# Altium PCB ATM90E3x-DB.PcbDoc
Units mil, origin at the board's own origin, x right, y up, seen from the top; angles counter-clockwise.
Board outline 4724.41 x 3543.31 mil, 2 copper layers (Top Layer, Bottom Layer); 146 components, 104 nets, 365 pads, 116 vias.
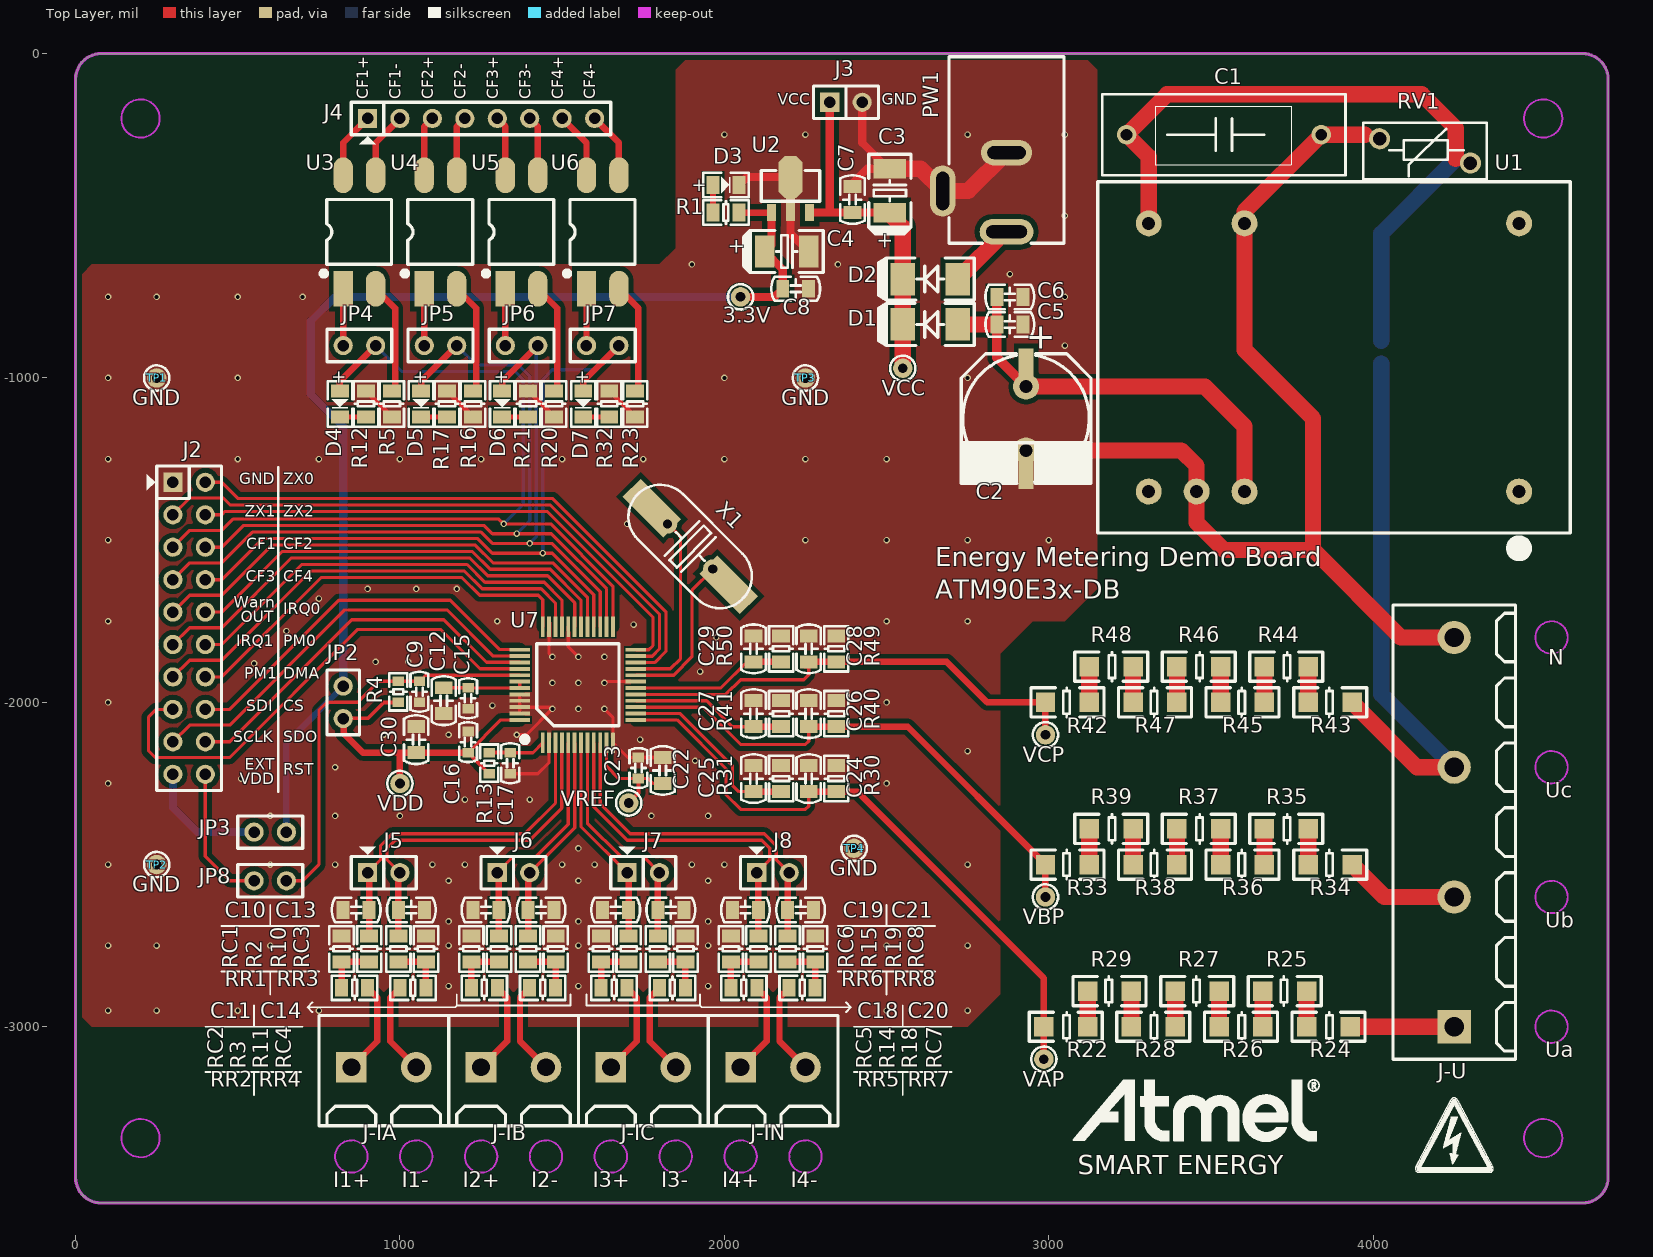
[diagram p0: Top Layer view]
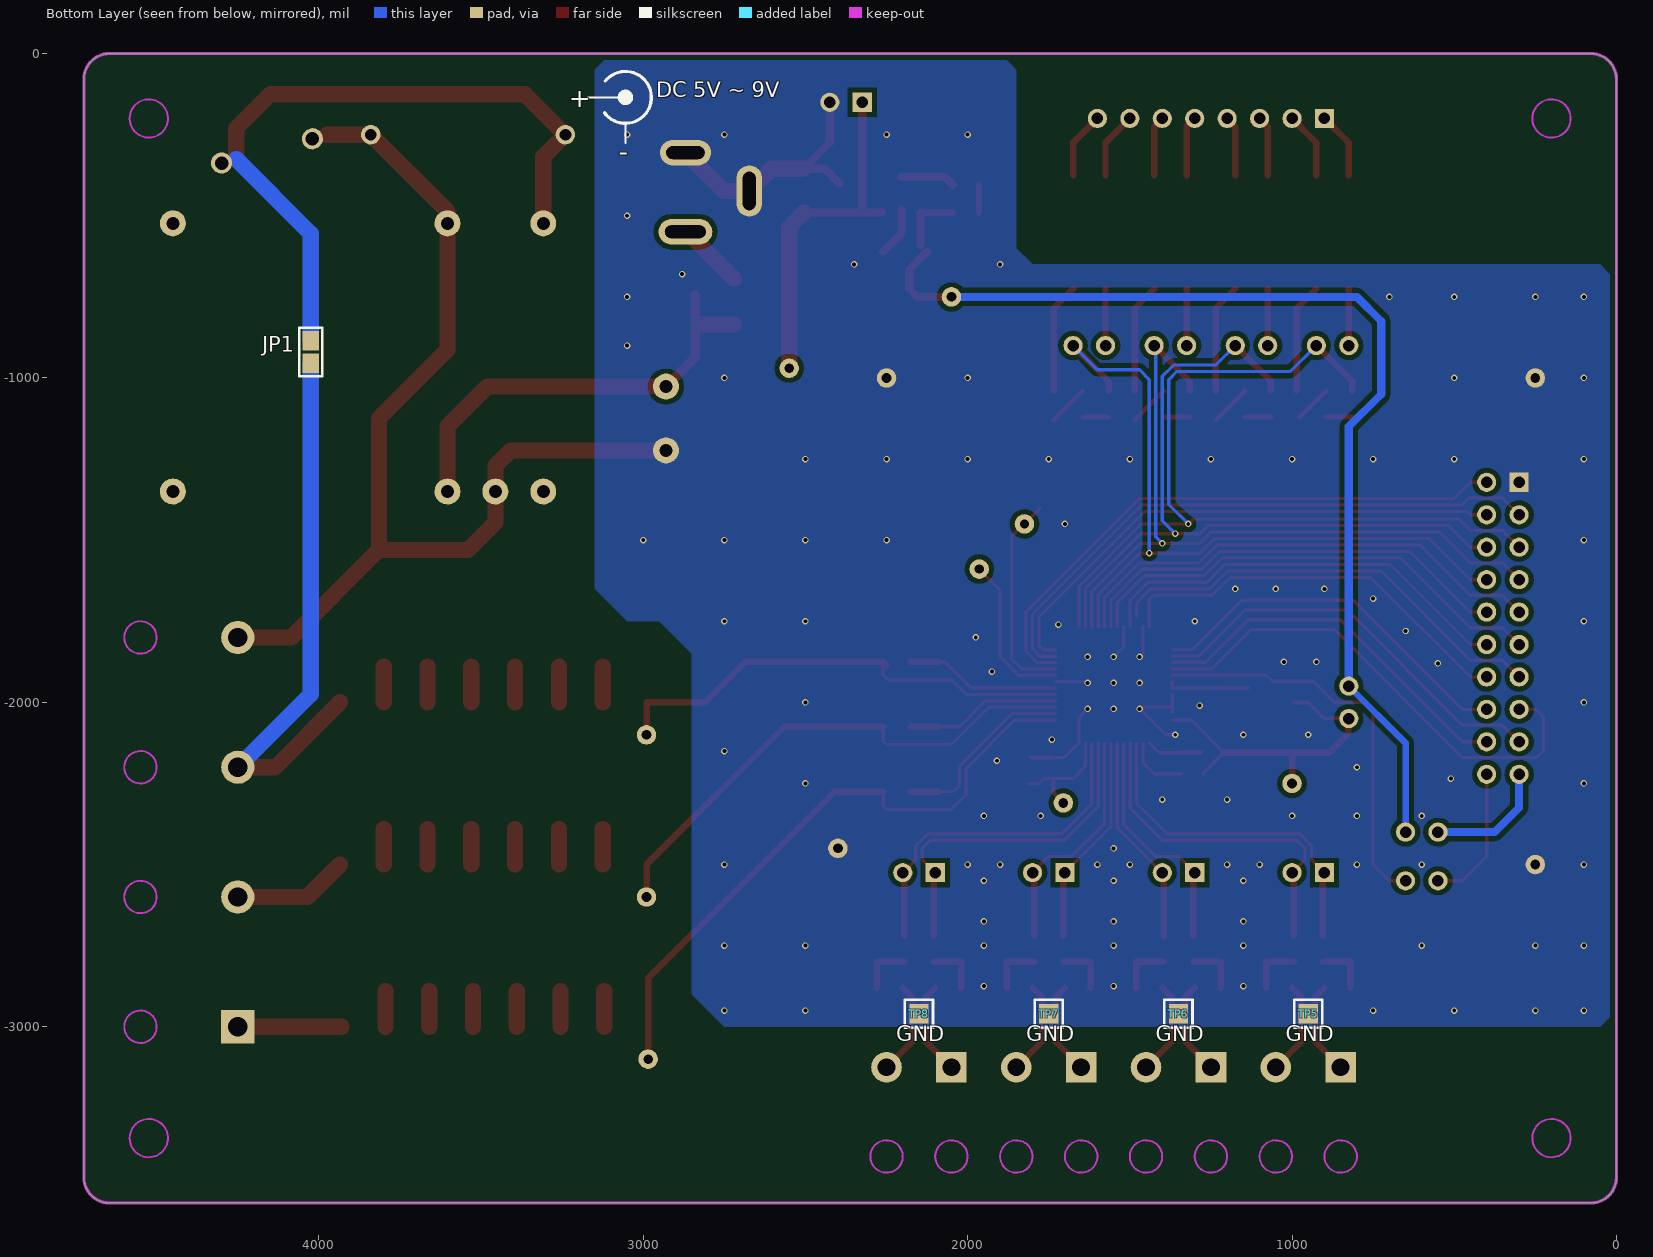
[diagram p1: Bottom Layer view, seen from below]
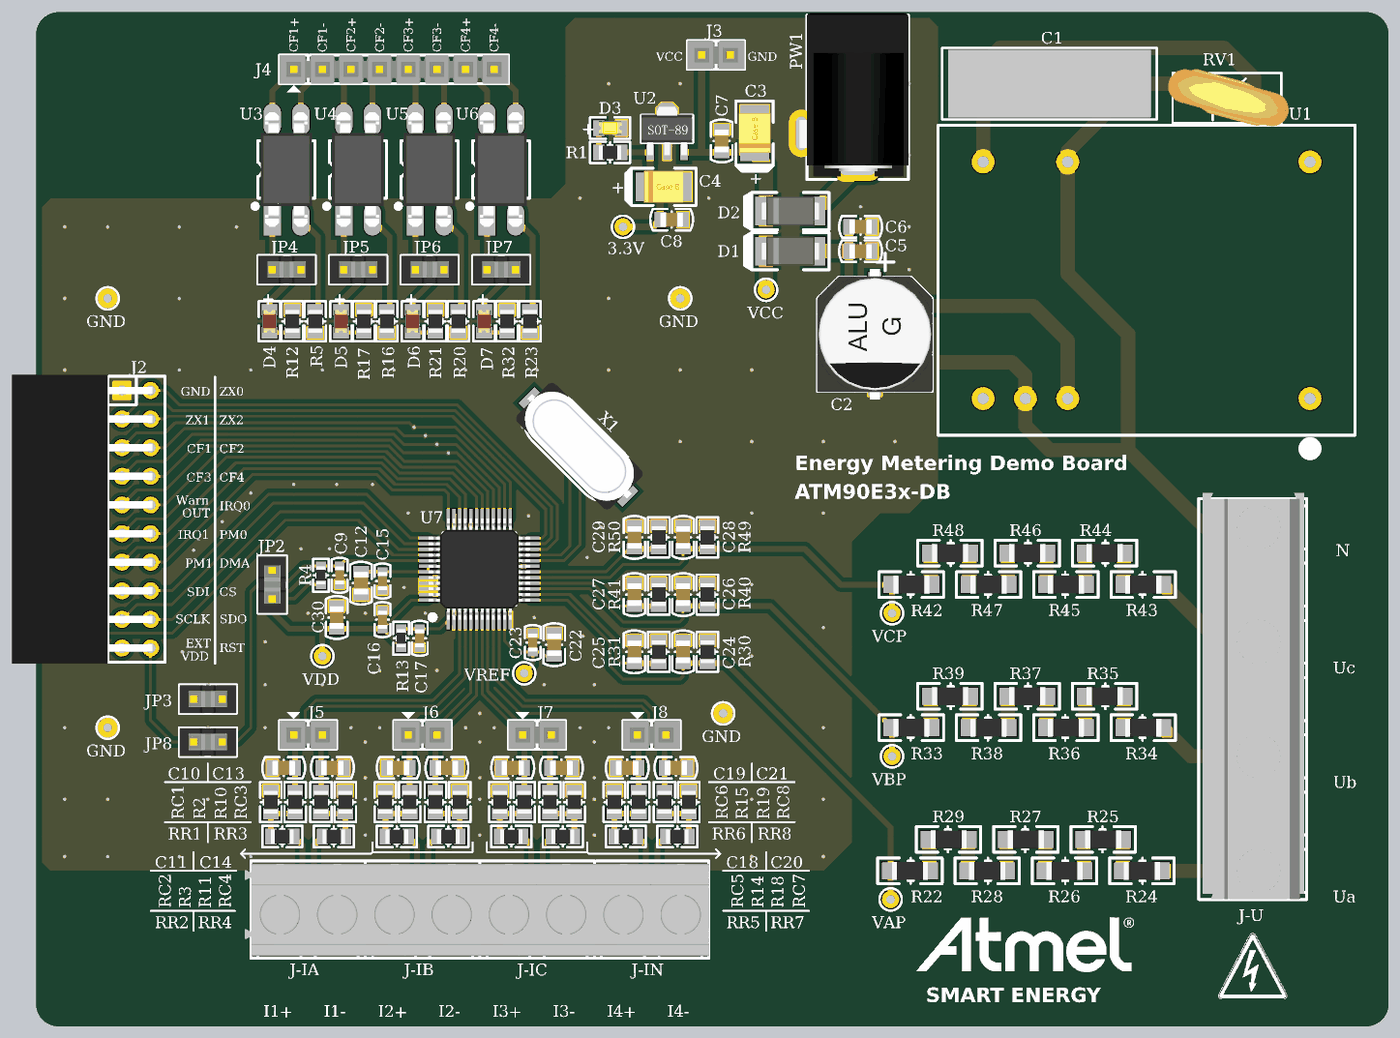
[diagram p2: 3D render of the assembled board from above, using the file's embedded part models]

## Layer stack, top to bottom
Top Layer: signal copper 1.4
Dielectric: dielectric 12.6, FR-4, Dk 4.8
Bottom Layer: signal copper 1.4

## Board outline
0,-3464.57 ccw(c78.74,-3464.57) 78.74,-3543.31 4645.67,-3543.31 ccw(c4645.67,-3464.57) 4724.41,-3464.57 4724.41,-78.74 ccw(c4645.67,-78.74) 4645.67,0 78.74,0 ccw(c78.74,-78.74) 0,-78.74

## Design rules (kind name [scope] priority, off if disabled: settings)
Clearance TQFP-48 [InComponent('U7')] p1: gap=6
Clearance Polygon [IsRegion] p2: gap=15
Clearance [All] p3: gap=8
MinimumSolderMaskSliver [All] p1 off: minsoldermaskwidth=10
NetAntennae [All] p1 off: netantennaetolerance=0
PolygonConnect [All] p1: connectstyle=Direct reliefconductorwidth=20 reliefentries=4 polygonreliefangle="90 Angle" airgapwidth=15
RoutingVias [All] p1: holewidth=28 width=50 viastyle="Through Hole" minholewidth=28 minwidth=50 maxholewidth=28 maxwidth=50
SilkToSilkClearance [All] p1 off: silktosilkclearance=10
SilkscreenOverComponentPads [All] p1 off: minsilkscreentomaskgap=10
SolderMaskExpansion [All] p1: expansion=4
Width [All] p1: maxlimit=100 minlimit=8 preferedwidth=10
24 further rules are at their usual default settings.

## Components (designator, comment, footprint, x,y, rotation, side; value= is the part's Value field where it differs from the comment)
3.3V "" TP 2050,-750 r0 top
C1 "100pF" C_FILM_600 3840,-250 r180 top
C2 "220uF" C_ALUM_MIX_10X10 2930,-1125 r180 top
C3 "22uF" C_TANT_B3528 2510,-490 r90 top
C4 "22uF" C_TANT_B3528 2125,-610 r0 top
C5 "10uF" C0805 2920,-835 r180 top
C6 "0.1uF" C0805 2920,-750 r180 top
C7 "0.1uF" C0805 2395,-410 r270 top
C8 "0.1uF" C0805 2260,-725 r180 top
C9 "0.1uF" C0603 1060,-2000 r90 top
C10 "18nF" C0805 825,-2640 r0 top
C11 "18nF" C0805 1305,-2640 r180 top
C12 "10uF" C0805 1135,-1955 r270 top
C13 "18nF" C0805 995,-2640 r0 top
C14 "18nF" C0805 1475,-2640 r180 top
C15 "0.1uF" C0603 1210,-2020 r90 top
C16 "0.1uF" C0603 1210,-2155 r90 top
C17 "0.1uF" C0603 1340,-2220 r90 top
C18 "18nF" C0805 1705,-2640 r180 top
C19 "18nF" C0805 2105,-2640 r180 top
C20 "18nF" C0805 1875,-2640 r180 top
C21 "18nF" C0805 2275,-2640 r180 top
C22 "10uF" C0805 1810,-2170 r270 top
C23 "0.1uF" C0603 1735,-2170 r270 top
C24 "18nF" C0805 2260,-2195 r270 top
C25 "18nF" C0805 2090,-2195 r270 top
C26 "18nF" C0805 2260,-1995 r270 top
C27 "18nF" C0805 2090,-1995 r270 top
C28 "18nF" C0805 2260,-1795 r270 top
C29 "18nF" C0805 2090,-1795 r270 top
C30 "10uF" C0805 1050,-2075 r270 top
D1 "1N4147" "SMA DO-214AC" 2720,-835 r180 top
D2 "1N4147" "SMA DO-214AC" 2720,-695 r180 top
D3 "Yellow" LED-0805Y 1965,-405 r0 top
D4 "Red" LED-0805R 815,-1040 r270 top
D5 "Red" LED-0805R 1065,-1040 r270 top
D6 "Red" LED-0805R 1315,-1040 r270 top
D7 "Red" LED-0805R 1565,-1040 r270 top
J2 "HDR2X10" HDR2X10 300,-1321.65 r270 top locked
J3 "HDR1X2" HDR1X2 2325,-150 r0 top
J4 "HDR1X8" HDR1X8 900,-200 r0 top
J5 "CON-2" HDR1X2(UPER) 900,-2525 r0 top
J6 "CON-2" HDR1X2(UPER) 1300,-2525 r0 top
J7 "CON-2" HDR1X2(UPER) 1700,-2525 r0 top
J8 "CON-2" HDR1X2(UPER) 2100,-2525 r0 top
J-IA "" TE-1776119-2 850,-3125 r0 top
J-IB "" TE-1776119-2 1250,-3125 r0 top
J-IC "" TE-1776119-2 1650,-3125 r0 top
J-IN "" TE-1776119-2 2050,-3125 r0 top
J-U "" TE-282843-4 4250,-3000 r90 top
JP1 "JMP" JMP-SMD 4025,-955 r90 bottom
JP2 "JMP" JMP 825,-1950 r270 top (schematic designator JP3)
JP3 "JMP" JMP 650,-2400 r180 top
JP4 "JMP" JMP 925,-900 r180 top
JP5 "JMP" JMP 1175,-900 r180 top
JP6 "JMP" JMP 1425,-900 r180 top
JP7 "JMP" JMP 1675,-900 r180 top
JP8 "JMP" JMP 650,-2550 r180 top (schematic designator JP3)
PW1 "PowerJack" POWERJACKET2.5 2870,-549.37 r180 top
R1 "510R" R0805 1965,-490 r0 top
R2 "1K" R0805 905,-2720 r270 top
R3 "1K" R0805 1305,-2800 r90 top
R4 "10K" R0603 995,-1935 r270 top
R5 "510R" R0805 975,-1120 r90 top
R10 "1K" R0805 995,-2720 r270 top
R11 "1K" R0805 1395,-2800 r90 top
R12 "510R" R0805 895,-1040 r270 top
R13 "0R" R0603 1275,-2220 r90 top
R14 "1K" R0805 1705,-2800 r90 top
R15 "1K" R0805 2105,-2800 r90 top
R16 "510R" R0805 1225,-1120 r90 top
R17 "510R" R0805 1145,-1040 r270 top
R18 "1K" R0805 1795,-2800 r90 top
R19 "1K" R0805 2195,-2800 r90 top
R20 "510R" R0805 1475,-1120 r90 top
R21 "510R" R0805 1395,-1040 r270 top
R22 "240K" R1206 3120,-3000 r180 top
R23 "510R" R0805 1725,-1120 r90 top
R24 "240K" R1206 3930,-3000 r180 top
R25 "240K" R1206 3660,-2890 r0 top
R26 "240K" R1206 3660,-3000 r180 top
R27 "240K" R1206 3390,-2890 r0 top
R28 "240K" R1206 3390,-3000 r180 top
R29 "240K" R1206 3120,-2890 r0 top
R30 "1K" R0805 2345,-2195 r270 top
R31 "1K" R0805 2175,-2195 r270 top
R32 "510R" R0805 1645,-1040 r270 top
R33 "240K" R1206 2990,-2500 r0 top
R34 "240K" R1206 3800,-2500 r0 top
R35 "240K" R1206 3800,-2390 r180 top
R36 "240K" R1206 3530,-2500 r0 top
R37 "240K" R1206 3530,-2390 r180 top
R38 "240K" R1206 3260,-2500 r0 top
R39 "240K" R1206 3260,-2390 r180 top
R40 "1K" R0805 2345,-1995 r270 top
R41 "1K" R0805 2175,-1995 r270 top
R42 "240K" R1206 2990,-2000 r0 top
R43 "240K" R1206 3800,-2000 r0 top
R44 "240K" R1206 3800,-1890 r180 top
R45 "240K" R1206 3530,-2000 r0 top
R46 "240K" R1206 3530,-1890 r180 top
R47 "240K" R1206 3260,-2000 r0 top
R48 "240K" R1206 3260,-1890 r180 top
R49 "1K" R0805 2345,-1795 r270 top
R50 "1K" R0805 2175,-1795 r270 top
RC1 "2R4" R0805 820,-2720 r270 top
RC2 "2R4" R0805 1220,-2720 r270 top
RC3 "2R4" R0805 1080,-2800 r90 top
RC4 "2R4" R0805 1480,-2800 r90 top
RC5 "2R4" R0805 1620,-2720 r270 top
RC6 "2R4" R0805 2020,-2720 r270 top
RC7 "2R4" R0805 1880,-2800 r90 top
RC8 "2R4" R0805 2280,-2800 r90 top
RR1 "0" R0805 820,-2880 r0 top
RR2 "0" R0805 1220,-2880 r0 top
RR3 "0" R0805 1080,-2880 r180 top
RR4 "0" R0805 1480,-2880 r180 top
RR5 "0" R0805 1620,-2880 r0 top
RR6 "0" R0805 2020,-2880 r0 top
RR7 "0" R0805 1880,-2880 r180 top
RR8 "0" R0805 2280,-2880 r180 top
RV1 "RES-V" VDRS10P510BSE 4160,-300 r270 top
TP1 "GND" TP 250,-1000 r0 top (schematic designator GND)
TP2 "GND" TP 250,-2500 r0 top (schematic designator GND)
TP3 "GND" TP 2250,-1000 r0 top (schematic designator GND)
TP4 "GND" TP 2400,-2450 r0 top (schematic designator GND)
TP5 "GND" TP-SMD 950,-2960 r180 bottom (schematic designator GND)
TP6 "GND" TP-SMD 1350,-2960 r180 bottom (schematic designator GND)
TP7 "GND" TP-SMD 1750,-2960 r180 bottom (schematic designator GND)
TP8 "GND" TP-SMD 2150,-2960 r180 bottom (schematic designator GND)
U1 "TMLM04109" TMLM04112 4450,-1350 r180 top
U2 "78L33" SOT-89 2145,-490 r0 top
U3 "NEC2501" PS2501L-1 825,-725 r90 top
U4 "NEC2501" PS2501L-1 1075,-725 r90 top
U5 "NEC2501" PS2501L-1 1325,-725 r90 top
U6 "NEC2501" PS2501L-1 1575,-725 r90 top
U7 "ATM90E36" TQFP-48(7X7) 1440,-2125 r90 top
VAP "" TP 2985,-3100 r90 top
VBP "" TP 2990,-2600 r90 top
VCC "" TP 2550,-970 r0 top
VCP "" TP 2990,-2100 r90 top
VDD "" TP 1000,-2250 r0 top (schematic designator DVDD)
VREF "" TP 1705,-2310 r0 top
X1 "16.384MHz" XTAL-MIX-49 1825,-1450 r315 top
? "Comment" Logo-ATMEL 3075,-3350 r0 top
? "Comment" "HIGH VOLTAGE (40%)" 4250,-3250 r0 top

## Footprints (in the part's own frame and the unit in brackets; to place one, negate y for a bottom-side part, rotate by r counter-clockwise, add the part's x,y. Pads: shape width x height; smd on the part's side, far side on the other; paste and mask are expansions set on the pad)
C0603 [mil] "C0603"
  rect 30x35 smd: 1(0,0) 2(65,0)
  silkscreen extent -29,-28 94,28, body extent 1,-16 64,16, height 35
C0805 [mil] "C0805"
  rect 40x55 smd: 1(0,0) 2(80,0)
  silkscreen extent -35,-38 115,38, body extent 1,-25 79,25, height 39
C_ALUM_MIX_10X10 [mil] "C_ALUM_MIX_10x10"
  round 80 hole 40: 1(0,-98.43) 2(0,98.43)
  rect 47.25x137.79 smd: 1(0,-147.64) 2(0,147.64)
  silkscreen extent -200,-200 200,200, body extent -203,-228 203,228, height 402
C_FILM_600 [mil]
  round 60 hole 36: 1(0,0) 2(600,0)
  silkscreen extent -75,-125 675,125, body extent -54,-118 654,118, height 111
C_TANT_B3528 [mil] "C_TANT_B3528"
  rect 60x100 smd: 1(0,0) 2(135,0)
  silkscreen extent -65,-65 180,65, body extent -1,-55 136,55, height 75
HDR1X2 [mm] "Connector; Header; 2 Position"
  rect 1.5x1.5 hole 0.9: 1(0,0)
  round 1.5 hole 0.9: 2(2.54,0)
  silkscreen extent -1.27,-1.27 3.81,1.27, body extent -1.27,-1.27 3.81,1.27, height 8.38
HDR1X2(UPER) [mm]
  rect 1.5x1.5 hole 0.9: 1(0,0)
  round 1.5 hole 0.9: 2(2.54,0)
  silkscreen extent -1.27,-1.27 3.81,2.03, body extent -1.27,-1.27 3.81,1.27, height 8.38
HDR1X8 [mm] "Connector; Header; 8 Position"
  rect 1.5x1.5 hole 0.9: 1(0,0)
  round 1.5 hole 0.9: 2(2.54,0) 3(5.08,0) 4(7.62,0) 5(10.16,0) 6(12.7,0) 7(15.24,0) 8(17.78,0)
  silkscreen extent -1.27,-2.03 19.05,1.27, body extent -1.27,-1.27 19.05,1.27, height 8.38
HDR2X10 [mm]
  rect 1.5x1.5 hole 0.9: 1(0,0)
  round 1.5 hole 0.9: 2(0,2.54) 3(2.54,0) 4(2.54,2.54) 5(5.08,0) 6(5.08,2.54) 7(7.62,0) 8(7.62,2.54) 9(10.16,0) 10(10.16,2.54) 11(12.7,0) 12(12.7,2.54) 13(15.24,0) 14(15.24,2.54) 15(17.78,0) 16(17.78,2.54) 17(20.32,0) 18(20.32,2.54) 19(22.86,0) 20(22.86,2.54)
  silkscreen extent -1.27,-2.03 24.13,3.81, body extent -1.4,-9.77 24.25,2.83, height 5.04
"HIGH VOLTAGE (40%)" [mil]
  silkscreen extent -120,-199 120,32
JMP [mm] "JMP"
  round 1.5 hole 0.9: 1(0,0) 2(2.54,0)
  silkscreen extent -1.27,-1.27 3.81,1.27, body extent -1.27,-1.27 3.81,1.27, height 8.51
JMP-SMD [mil] "JMP-SMD"
  rect 60x50 smd: 1(0,0) 2(70,0)
  silkscreen extent -40,-35 110,35
LED-0805R [mil] "LED 0805, Red"
  rect 40x55 smd: A(0,0) K(80,0)
  silkscreen extent -30,-38 110,38, body extent 0,-25 80,25, height 43
LED-0805Y [mil] "LED 0805, Yellow"
  rect 40x55 smd: A(0,0) K(80,0)
  silkscreen extent -30,-38 110,38, body extent 0,-25 80,25, height 43
Logo-ATMEL [mil]
  silkscreen extent 0,-4 760,187
POWERJACKET2.5 [mm] "PowerJacket2.5"
  oval 4.2x2 hole 1 slot 3.2 at 0 deg: 1(0,0)
  oval 4x2 hole 1 slot 3 at 0 deg: 2(0,-6.2)
  oval 2x4 hole 1 slot 3 at 90 deg: 3(5,-3.2)
  silkscreen extent -4.5,-13.7 4.5,0.9, body extent -4.5,-13.85 5.3,0.65, height 11.03
PS2501L-1 [mil] "PS2501L-1"
  rect 110.24x60 smd: 1(0,0)
  oval 110.24x60 smd: 2(0,-100) 3(350,-100) 4(350,0)
  silkscreen extent 39,-149 275,68, body extent -25,-140 375,41, height 152
R0603 [mil] "R0603"
  rect 30x35 smd: 1(0,0) 2(65,0)
  silkscreen extent -25,-28 90,28, body extent 1,-16 64,16, height 16
R0805 [mil] "R0805"
  rect 40x55 smd: 1(0,0) 2(80,0)
  silkscreen extent -30,-38 110,38, body extent 1,-25 79,25, height 20
R1206 [mil] "R1206"
  rect 60x60 smd: 1(0,0) 2(135,0)
  silkscreen extent -45,-45 180,45, body extent 5,-31 130,32, height 22
"SMA DO-214AC" [mil] "DIODE, SMA DO-214AC"
  rect 75x100 smd: A(0,0) K(170,0)
  silkscreen extent -50,-65 245,65, body extent -17,-51 187,51, height 95
SOT-89 [mm] "SOT-89"
  rect 0.7x1.35 smd: 1(0,0) 3(3,0)
  rect 0.7x1.8 smd: 2(1.5,0.225)
  oct 1.9x3.3 smd: 2(1.5,2.775)
  silkscreen extent -0.79,0.88 3.79,3.29, body extent -0.75,-0.24 3.75,4.05, height 1.51
TE-282843-4 [mm]
  rect 2.6x2.6 hole 1.5: 1(0,0)
  round 2.6 hole 1.5: 2(10.16,0) 3(20.32,0) 4(30.48,0)
  silkscreen extent -2.54,-4.8 33.02,4.8, body extent -2.54,-4.57 33.52,4.43, height 15.22
TE-1776119-2 [mm]
  rect 2.4x2.4 hole 1.4: 1(0,0)
  round 2.4 hole 1.4: 2(5.08,0)
  silkscreen extent -2.54,-4.57 7.62,4.06, body extent -3.09,-4.39 7.67,3.81, height 10.04
TMLM04112 [mil] "TMLM04112"
  round 80 hole 40: 1(0,0) 2(846.45,0) 3(994.09,0) 4(1141.73,0) 5(1141.73,-826.77) 6(846.45,-826.77) 7(0,-826.77)
  silkscreen extent -157,-955 1299,195, body extent -159,-953 1301,127, height 675
TP [mil] "TP"
  round 60 hole 30: 1(0,0)
  silkscreen extent -39,-39 39,39
TP-SMD [mil] "JMP-SMD"
  rect 60x60 smd: 1(0,0)
  silkscreen extent -43,-43 43,43
TQFP-48(7X7) [mm] "PSC-4167; Outline: 7.0mm x 7.0mm x 1.0mm; Pitch: 0.5 mm"
  rect 1.6x0.3 smd: 1(0,0) 2(0,-0.5) 3(0,-1) 4(0,-1.5) 5(0,-2) 6(0,-2.5) 7(0,-3) 8(0,-3.5) 9(0,-4) 10(0,-4.5) 11(0,-5) 12(0,-5.5) 25(9.1,-5.5) 26(9.1,-5) 27(9.1,-4.5) 28(9.1,-4) 29(9.1,-3.5) 30(9.1,-3) 31(9.1,-2.5) 32(9.1,-2) 33(9.1,-1.5) 34(9.1,-1) 35(9.1,-0.5) 36(9.1,0)
  rect 0.3x1.6 smd: 13(1.8,-7.3) 14(2.3,-7.3) 15(2.8,-7.3) 16(3.3,-7.3) 17(3.8,-7.3) 18(4.3,-7.3) 19(4.8,-7.3) 20(5.3,-7.3) 21(5.8,-7.3) 22(6.3,-7.3) 23(6.8,-7.3) 24(7.3,-7.3) 37(7.3,1.8) 38(6.8,1.8) 39(6.3,1.8) 40(5.8,1.8) 41(5.3,1.8) 42(4.8,1.8) 43(4.3,1.8) 44(3.8,1.8) 45(3.3,1.8) 46(2.8,1.8) 47(2.3,1.8) 48(1.8,1.8)
  silkscreen extent 0.08,-5.96 7.76,1.6, body extent 0.05,-7.25 9.05,1.75, height 1.6
VDRS10P510BSE [mil] "VDRS10P510BSE"
  round 65 hole 42: 1(-37.5,-140) 2(37.5,140)
  silkscreen extent -87,-190 88,190, body extent -123,-222 123,232, height 472
XTAL-MIX-49 [mm]
  rect 4.5x2 smd: 1(-1.75,0) 2(6.75,0)
  round 1.524 hole 0.711: 1(0,0) 2(5,0)
  silkscreen extent -3.3,-2.5 8.3,2.5, body extent -3.75,-2.29 8.75,2.51, height 4.05

## Part data
3.3V TP1 TP2 TP3 TP4 TP5 TP6 TP7 TP8 VAP VBP VCC VCP VDD VREF: library part TEST-POINT
C1: library part CAP-FILM
C2: library part CAP-ALUM
C3 C4: library part CAP-TANT
C5 C6 C7 C8 C9 C10 C11 C12 C13 C14 C15 C16 C17 C18 C19 C20 C21 C22 C23 C24 C25 C26 C27 C28 C29 C30: library part CAP
D1 D2: library part DIODE
D3 D4 D5 D6 D7: library part LED
J-IA J-IB J-IC J-IN: library part Terminal-Screw-2
J-U: library part Terminal-Screw-4
R1 R2 R3 R4 R5 R10 R11 R12 R13 R14 R15 R16 R17 R18 R19 R20 R21 R22 R23 R24 R25 R26 R27 R28 R29 R30 R31 R32 R33 R34 R35 R36 R37 R38 R39 R40 R41 R42 R43 R44 R45 R46 R47 R48 R49 R50 RC1 RC2 RC3 RC4 RC5 RC6 RC7 RC8 RR1 RR2 RR3 RR4 RR5 RR6 RR7 RR8: library part RES
U1: library part TMLM04112
U2: library part 78LXX
U7: library part ATM90E3X, "ATM90E3X"
X1: library part XTAL-T

## Via types
v1: diameter 20, hole 12, Top Layer to Bottom Layer, 116 vias

## Nets (pads, with @x,y where several pads share a name; then routed paths per layer and width w, separated by ;. In a path a pad name is that pad's centre, name@x,y a point inside that pad or via, vN(x,y) a via of type N, cw(c..) or ccw(c..) an arc to the next point about the centre after c; other vN are vias at no path point)
AVDD33: C17.2 R13.2 U7.1 | length 172.4
  Top Layer w10: C17.2 1410,-2155 U7.1
  Top Layer w12: R13.2@1280,-2155 C17.2
CF1: D4.A J2.5 JP4.1 U7.25 | length 2756.9
  Top Layer w10: J2.5 351.65,-1470 450,-1470 485,-1435 1305,-1435 v1(1320,-1450) 1464.71,-1450 1656.54,-1641.83 U7.25
  Top Layer w20: D4.A 815,-1010 JP4.1
  Bottom Layer w10: JP4.1 1005,-980 1355,-980 1380,-1005 1380,-1390 v1(1320,-1450)
CF2: D5.A J2.6 JP5.1 U7.26 | length 2413.2
  Top Layer w10: J2.6 450,-1521.65 516.65,-1455 1260,-1455 1285,-1480 v1(1360,-1480) 1466.42,-1480 1636.85,-1650.43 U7.26
  Top Layer w20: D5.A 1065,-1010 JP5.1
  Bottom Layer w10: JP5.1 1235,-960 1365,-960 1400,-995 1400,-1440 v1(1360,-1480)
CF3: D6.A J2.7 JP6.1 U7.27 | length 2360.7
  Top Layer w10: J2.7 351.65,-1570 450,-1570 545,-1475 1250,-1475 1285,-1510 v1(1400,-1510) 1468.14,-1510 1617.16,-1659.03 U7.27
  Top Layer w20: D6.A 1315,-1010 JP6.1
  Bottom Layer w10: v1(1400,-1510) 1420,-1490 JP6.1@1420,-905
CF4: D7.A J2.8 JP7.1 U7.28 | length 2419.6
  Top Layer w10: J2.8 450,-1621.65 576.65,-1495 1240,-1495 1285,-1540 v1(1440,-1540) 1469.85,-1540 1597.48,-1667.63 U7.28
  Top Layer w20: D7.A 1565,-1010 JP7.1
  Bottom Layer w10: v1(1440,-1540) 1440,-1005 1470,-975 1600,-975 JP7.1
CS: J2.16 U7.37 | length 1187
  Top Layer w10: J2.16@378.35,-2021.65 J2.16@389.17,-2010.83 ; J2.16 475,-2021.65 811.65,-1685 1155,-1685 1307.28,-1837.28 U7.37@1369.13,-1837.28
DMA: J2.14 U7.36 | length 1278.8
  Top Layer w10: J2.14 450,-1921.65 756.65,-1615 1190.29,-1615 1245.29,-1670 1426.72,-1670 1440,-1683.28 U7.36
DVDD33: C16.1 C30.2 JP2.2 R4.2 R13.1 U7.48 VDD.1 | length 1032
  Top Layer w10: C16.1 1310.87,-2054.13 U7.48
  Top Layer w12: JP2.2@826,-2049 901,-2049 950,-2000 R4.2 ; C16.1 R13.1
  Top Layer w20: JP2.2@826,-2049 826,-2095 886,-2155 1000,-2155 ; VDD.1 1000,-2155 ; C16.1 C30.2 1000,-2155
IAN: C13.1 J5.2 R10.1 U7.4 | length 1073
  Top Layer w10: J5.2 960,-2485 960,-2450 985,-2425 1400,-2425 1499.06,-2325.95 U7.4
  Top Layer w20: R10.1 C13.1 J5.2@995,-2530
IAP: C10.2 J5.1 R2.1 U7.3 | length 1069.2
  Top Layer w10: J5.1 940,-2485 940,-2441.72 976.72,-2405 1385,-2405 1479.37,-2310.63 U7.3
  Top Layer w20: R2.1 C10.2 J5.1@905,-2530
IBN: C14.2 J6.2 R11.2 U7.6 | length 647.3
  Top Layer w10: J6.2 1538.42,-2386.57 U7.6
  Top Layer w20: R11.2 C14.2 J6.2@1395,-2530
IBP: C11.1 J6.1 R3.2 U7.5 | length 721.6
  Top Layer w10: J6.1 1350,-2475 1420,-2475 1518.74,-2376.26 U7.5
  Top Layer w20: R3.2 C11.1 J6.1@1305,-2530
ICN: C20.2 J7.2 R18.2 U7.8 | length 723
  Top Layer w10: U7.8 1577.79,-2372.8 1680,-2475 1750,-2475 J7.2
  Top Layer w20: R18.2 C20.2 J7.2@1795,-2530
ICP: C18.1 J7.1 R14.2 U7.7 | length 648.8
  Top Layer w10: U7.7 1558.11,-2383.11 J7.1
  Top Layer w20: R14.2 C18.1 J7.1@1705,-2530
INN: C21.2 J8.2 R19.2 U7.10 | length 1073.5
  Top Layer w10: U7.10 1617.16,-2312.16 1710,-2405 2123.28,-2405 2160,-2441.72 2160,-2485 J8.2
  Top Layer w20: R19.2 C21.2 J8.2@2195,-2530
INP: C19.1 J8.1 R15.2 U7.9 | length 1074.4
  Top Layer w10: U7.9 1597.48,-2322.48 1700,-2425 2115,-2425 2140,-2450 2140,-2485 J8.1
  Top Layer w20: R15.2 C19.1 J8.1@2105,-2530
IRQ0: J2.10 U7.30 | length 1379.4
  Top Layer w10: J2.10 450,-1721.65 636.65,-1535 1223.43,-1535 1278.43,-1590 1463.28,-1590 1558.11,-1684.83 U7.30
IRQ1: J2.11 U7.31 | length 1479.5
  Top Layer w10: J2.11 351.65,-1770 450,-1770 665,-1555 1215.15,-1555 1270.15,-1610 1455,-1610 1538.42,-1693.43 U7.31
N: C1.1 C2.2 C3.2 C4.2 C5.1 C6.1 C7.1 C8.1 C9.1 C10.1 C11.2 C12.2 C13.2 C14.1 C15.1 C16.2 C17.1 C18.2 C19.2 C20.1 C21.1 C22.1 C23.1 C24.1 C25.1 C26.1 C27.1 C28.1 C29.1 C30.1 D3.K J2.1 J3.2 J-U.4 PW1.2 PW1.3 R5.1 R12.1 R16.1 R17.1 R20.1 R21.1 R23.1 R30.1 R31.1 R32.1 R40.1 R41.1 R49.1 R50.1 RC1.1 RC2.1 RC3.2 RC4.2 RC5.1 RC6.1 RC7.2 RC8.2 RV1.1 TP1.1 TP2.1 TP3.1 TP4.1 TP5.1 TP6.1 TP7.1 TP8.1 U1.3 U1.6 U2.2 U7.2 U7.12 U7.19 U7.32 U7.35 U7.44 U7.45 U7.46 U7.47 | length 5969.7
  Top Layer w10: C17.1 1425,-2220 1459.68,-2185.32 U7.2 ; v1(1360,-2100) 1390,-2100 v1(1470,-2020) 1464.76,-2014.76 U7.46 ; U7.47@1369.13,-2031.63 U7.46 ; U7.44 U7.45 U7.46 ; U7.35 1459.68,-1849.68 v1(1470,-1860) ; U7.32 1518.74,-1828.74 v1(1550,-1860) ; v1(1630,-2020) 1656.54,-2046.53 U7.12 1701.54,-2170 C23.1 ; v1(1630,-1940) 1633.98,-1936.02 U7.19
  Top Layer w12: C23.1 C22.1@1805,-2170
  Top Layer w15: R12.1 R5.1 ; R17.1 R16.1 R16.1@1235,-1130 ; R21.1 R20.1 R20.1@1485,-1130 ; R32.1 R23.1 R23.1@1735,-1130
  Top Layer w25: D3.K 2069.25,-380.75 U2.2@2204.06,-380.75 ; U2.2@2204.06,-481.14 2204.06,-554.06 C4.2 ; C7.1@2395,-400 2440,-355 2505,-355 2425,-275 J3.2
  Top Layer w50: C3.2@2505,-355 2604.76,-355 PW1.3 2751.89,-423.39 PW1.2 ; C2.2@2930,-1223.43 3408.43,-1223.43 3455.91,-1270.91 U1.3 3455.91,-1445.91 3540,-1530 3815,-1530 ; 3975,-250 C1.1 3603.55,-486.45 U1.6 3603.55,-913.55 3815,-1125 3815,-1530 ; J-U.4 4085,-1800 3815,-1530
  other v1: 100,-2950 250,-2950 500,-2950 750,-2950 2500,-2950 2750,-2950 1150,-2875 1550,-2875 1950,-2875 100,-2750 250,-2750 600,-2750 1150,-2750 1550,-2750 1950,-2750 2500,-2750 2750,-2750 1150,-2675 1550,-2675 1950,-2675 1150,-2550 1550,-2550 1950,-2550 100,-2500 600,-2500 800,-2500 1100,-2500 1200,-2500 1500,-2500 1600,-2500 1900,-2500 2000,-2500 2750,-2500 1550,-2450 600,-2350 800,-2350 1000,-2350 1775,-2350 1950,-2350 1200,-2300 1400,-2300 100,-2250 2500,-2250 510,-2235 800,-2200 1910,-2180 2750,-2150 1740,-2115 950,-2100 1150,-2100 1550,-2020 1285,-2010 100,-2000 2500,-2000 1470,-1940 1550,-1940 1925,-1905 550,-1880 925,-1875 1025,-1875 1630,-1860 1975,-1800 650,-1780 1720,-1760 100,-1750 1300,-1750 2500,-1750 2750,-1750 750,-1680 900,-1650 1050,-1650 1175,-1650 100,-1500 2250,-1500 2500,-1500 2750,-1500 3000,-1500 1700,-1450 100,-1250 500,-1250 750,-1250 1000,-1250 1250,-1250 1500,-1250 1750,-1250 2000,-1250 2250,-1250 2500,-1250 100,-1000 500,-1000 2000,-1000 2750,-1000 3050,-900 100,-750 250,-750 500,-750 700,-750 3050,-750 2880,-680 1900,-650 2350,-650 3050,-500 2000,-250 2250,-250 2750,-250 3050,-250
Net3.3V_1: 3.3V.1 C4.1 C8.2 JP2.1 JP3.1 R1.2 U2.1 | length 3523.1
  Top Layer w20: R1.2 U2.1
  Top Layer w25: 3.3V.1 2155,-750 C8.2 2180,-665 C4.1 ; C4.1@2145,-590 U2.1
  Bottom Layer w20: JP3.1 650,-2125 JP2.1
  Bottom Layer w25: JP2.1 825,-1150 725,-1050 725,-825 800,-750 3.3V.1
NetC1_2: C1.2 JP1.2 RV1.2 U1.5 | length 2162
  Top Layer w50: U1.5 3308.27,-318.27 C1.2 3365,-125 4150,-125 4255,-230 4255,-325
  Bottom Layer w50: JP1.2 4025,-555 4255,-325
NetC2_1: C2.1 C5.2 C6.2 D1.A U1.2 | length 1354.4
  Top Layer w30: C6.2@2840,-745 C5.2 2840,-936.57 C2.1@2930,-1026.57
  Top Layer w50: D1.A C5.2@2830,-835 ; C2.1@2930,-1026.57 3481.57,-1026.57 3603.55,-1148.55 U1.2
NetC9_2: C9.2 JP8.1 R4.1 U7.41 | length 1259.9
  Top Layer w10: JP8.1 700,-2550 750,-2500 750,-2025 775,-2000 870,-2000 935,-1935 R4.1 C9.2 1078.66,-1916.34 U7.41
NetC12_1: C12.1 C15.2 U7.42 U7.43 | length 252.8
  Top Layer w10: C15.2@1210.71,-1955.71 U7.43 ; U7.43@1369.13,-1955.39 U7.42
  Top Layer w12: C12.1 C15.2
NetC22_2: C22.2 C23.2 U7.11 VREF.1 | length 354.4
  Top Layer w10: U7.11 1636.85,-2196.85 1675,-2235 C23.2 1765,-2235 1780,-2250 C22.2
  Top Layer w12: VREF.1 1735,-2280 C23.2
NetD2_A: D2.A PW1.1 | length 210.3
  Top Layer w50: D2.A 2865.63,-549.37 PW1.1
NetD3_A: D3.A R1.1 | length 85
  Top Layer w20: R1.1 D3.A
NetD4_K: D4.K R12.2 | length 80
  Top Layer w15: D4.K R12.2
NetD5_K: D5.K R17.2 | length 80
  Top Layer w15: D5.K R17.2
NetD6_K: D6.K R21.2 | length 80
  Top Layer w15: D6.K R21.2
NetD7_K: D7.K R32.2 | length 80
  Top Layer w15: D7.K R32.2
NetJ4_1: J4.1 U3.4 | length 206.1
  Top Layer w20: U3.4 825,-275 J4.1
NetJ4_2: J4.2 U3.3 | length 206.1
  Top Layer w20: U3.3 925,-275 J4.2
NetJ4_3: J4.3 U4.4 | length 185.4
  Top Layer w20: U4.4 1075,-225 J4.3
NetJ4_4: J4.4 U4.3 | length 185.4
  Top Layer w20: U4.3 1175,-225 J4.4
NetJ4_5: J4.5 U5.4 | length 185.4
  Top Layer w20: J4.5 1325,-225 U5.4
NetJ4_6: J4.6 U5.3 | length 185.4
  Top Layer w20: J4.6 1425,-225 U5.3
NetJ4_7: J4.7 U6.4 | length 206.1
  Top Layer w20: J4.7 1575,-275 U6.4
NetJ4_8: J4.8 U6.3 | length 206.1
  Top Layer w20: J4.8 1675,-275 U6.3
NetJ-IA_1: J-IA.1 RR1.2 | length 290.6
  Top Layer w20: J-IA.1 930,-3045 930,-2910 RR1.2
NetJ-IA_2: J-IA.2 RR3.2 | length 290.6
  Top Layer w20: RR3.2 970,-2910 970,-3045 J-IA.2
NetJ-IB_1: J-IB.1 RR2.2 | length 290.6
  Top Layer w20: J-IB.1 1330,-3045 1330,-2910 RR2.2
NetJ-IB_2: J-IB.2 RR4.2 | length 290.6
  Top Layer w20: RR4.2 1370,-2910 1370,-3045 J-IB.2
NetJ-IC_1: J-IC.1 RR5.2 | length 290.6
  Top Layer w20: J-IC.1 1730,-3045 1730,-2910 RR5.2
NetJ-IC_2: J-IC.2 RR7.2 | length 290.6
  Top Layer w20: RR7.2 1770,-2910 1770,-3045 J-IC.2
NetJ-IN_1: J-IN.1 RR6.2 | length 290.6
  Top Layer w20: J-IN.1 2130,-3045 2130,-2910 RR6.2
NetJ-IN_2: J-IN.2 RR8.2 | length 290.6
  Top Layer w20: RR8.2 2170,-2910 2170,-3045 J-IN.2
NetJP4_2: JP4.2 U3.1 | length 175
  Top Layer w20: JP4.2 U3.1
NetJP5_2: JP5.2 U4.1 | length 175
  Top Layer w20: JP5.2 U4.1
NetJP6_2: JP6.2 U5.1 | length 175
  Top Layer w20: JP6.2 U5.1
NetJP7_2: JP7.2 U6.1 | length 175
  Top Layer w20: JP7.2 U6.1
NetR2_2: R2.2 RC1.2 RR1.1 | length 165
  Top Layer w20: RR1.1 RC1.2 R2.2
NetR3_1: R3.1 RC2.2 RR2.1 | length 165
  Top Layer w20: RR2.1 RC2.2 R3.1
NetR5_2: R5.2 U3.2 | length 339.9
  Top Layer w20: U3.2 985,-785 R5.2@985,-1040
NetR10_2: R10.2 RC3.1 RR3.1 | length 165
  Top Layer w20: R10.2 RC3.1 RR3.1
NetR11_1: R11.1 RC4.1 RR4.1 | length 165
  Top Layer w20: R11.1 RC4.1 RR4.1
NetR14_1: R14.1 RC5.2 RR5.1 | length 165
  Top Layer w20: RR5.1 RC5.2 R14.1
NetR15_1: R15.1 RC6.2 RR6.1 | length 165
  Top Layer w20: RR6.1 RC6.2 R15.1
NetR16_2: R16.2 U4.2 | length 339.9
  Top Layer w20: U4.2 1235,-785 R16.2@1235,-1040
NetR18_1: R18.1 RC7.1 RR7.1 | length 165
  Top Layer w20: R18.1 RC7.1 RR7.1
NetR19_1: R19.1 RC8.1 RR8.1 | length 165
  Top Layer w20: R19.1 RC8.1 RR8.1
NetR20_2: R20.2 U5.2 | length 339.9
  Top Layer w20: U5.2 1485,-785 R20.2@1485,-1040
NetR22_1: R22.1 R29.1 | length 110
  Top Layer w50: R22.1 R29.1
NetR23_2: R23.2 U6.2 | length 339.9
  Top Layer w20: U6.2 1735,-785 R23.2@1735,-1040
NetR24_2: R24.2 R25.2 | length 110
  Top Layer w50: R24.2 R25.2
NetR25_1: R25.1 R26.1 | length 110
  Top Layer w50: R26.1 R25.1
NetR26_2: R26.2 R27.2 | length 110
  Top Layer w50: R26.2 R27.2
NetR27_1: R27.1 R28.1 | length 110
  Top Layer w50: R28.1 R27.1
NetR28_2: R28.2 R29.2 | length 110
  Top Layer w50: R28.2 R29.2
NetR33_2: R33.2 R39.2 | length 110
  Top Layer w50: R33.2 R39.2
NetR34_1: R34.1 R35.1 | length 110
  Top Layer w50: R34.1 R35.1
NetR35_2: R35.2 R36.2 | length 110
  Top Layer w50: R36.2 R35.2
NetR36_1: R36.1 R37.1 | length 110
  Top Layer w50: R36.1 R37.1
NetR37_2: R37.2 R38.2 | length 110
  Top Layer w50: R38.2 R37.2
NetR38_1: R38.1 R39.1 | length 110
  Top Layer w50: R38.1 R39.1
NetR42_2: R42.2 R48.2 | length 110
  Top Layer w50: R42.2 R48.2
NetR43_1: R43.1 R44.1 | length 110
  Top Layer w50: R43.1 R44.1
NetR44_2: R44.2 R45.2 | length 110
  Top Layer w50: R45.2 R44.2
NetR45_1: R45.1 R46.1 | length 110
  Top Layer w50: R45.1 R46.1
NetR46_2: R46.2 R47.2 | length 110
  Top Layer w50: R47.2 R46.2
NetR47_1: R47.1 R48.1 | length 110
  Top Layer w50: R47.1 R48.1
NetU7_20: U7.20 X1.2 | length 492.9
  Top Layer w10: U7.20 1843.66,-1916.34 1900,-1860 1900,-1655 X1.2@1965,-1590
NetU7_21: U7.21 X1.1 | length 651.2
  Top Layer w10: U7.21 1833.35,-1896.65 1865,-1865 1865,-1490 X1.1@1776.28,-1401.28
PM0: J2.12 U7.33 | length 1329.2
  Top Layer w10: J2.12 450,-1821.65 696.65,-1575 1206.86,-1575 1261.86,-1630 1445,-1630 1499.37,-1684.37 U7.33@1499.37,-1766.73
PM1: J2.13 U7.34 | length 1396.5
  Top Layer w10: J2.13 351.65,-1870 450,-1870 725,-1595 1198.58,-1595 1253.58,-1650 1435,-1650 1479.37,-1694.37 1479.37,-1735
RST: J2.20 JP8.2 | length 434.4
  Top Layer w10: J2.20 400,-2475 475,-2550 JP8.2
SCLK: J2.17 U7.38 | length 1296.5
  Top Layer w10: J2.17 351.65,-2070 475,-2070 830,-1715 1145,-1715 1287.28,-1857.28 U7.38
SDI: J2.15 U7.40 | length 1556.1
  Top Layer w10: J2.15 248.35,-2021.65 225,-2045 225,-2150 245,-2170 475,-2170 870,-1775 1125,-1775 1246.65,-1896.65 U7.40
SDO: J2.18 U7.39 | length 1187.9
  Top Layer w10: J2.18@388.35,-2121.65 J2.18@394.17,-2115.83 ; J2.18 475,-2121.65 851.65,-1745 1135,-1745 1266.65,-1876.65 U7.39@1369.13,-1876.65
UA: J-U.1 R24.1 | length 320
  Top Layer w50: R24.1 J-U.1
UB: J-U.2 R34.2 | length 356.4
  Top Layer w50: R34.2 4035,-2600 J-U.2
UC: J-U.3 JP1.1 R43.2 | length 1736
  Top Layer w50: R43.2 4135,-2200 J-U.3
  Bottom Layer w50: JP1.1 4025,-1975 J-U.3
VAN: C25.2 R31.2 U7.14 | length 582.4
  Top Layer w10: U7.14 1864.45,-2034.45 2025,-2195 2025,-2255 2045,-2275 C25.2
  Top Layer w20: C25.2 R31.2
VAP: C24.2 R22.2 R30.2 U7.13 VAP.1 | length 1946
  Top Layer w10: U7.13 1854.13,-2054.13 2005,-2205 2005,-2285 2050,-2330 2250,-2330 2260,-2320 C24.2@2260,-2285
  Top Layer w20: C24.2 R30.2 2410,-2275 2985,-2850 R22.2 VAP.1
VBN: C27.2 R41.2 U7.16 | length 480.7
  Top Layer w10: U7.16 1945.08,-1995.08 2025,-2075 C27.2
  Top Layer w20: C27.2 R41.2
VBP: C26.2 R33.1 R40.2 U7.15 VBP.1 | length 1635.5
  Top Layer w10: U7.15 1934.76,-2014.76 2050,-2130 2250,-2130 2260,-2120 2260,-2085 C26.2
  Top Layer w20: C26.2 R40.2 2565,-2075 R33.1 VBP.1
VCC: C3.1 C7.2 D1.K D2.K J3.1 U2.3 VCC.1 | length 1075.5
  Top Layer w25: U2.3 2325,-490 ; J3.1 2325,-490 ; C3.1@2505,-490 C7.2 2325,-490
  Top Layer w50: C3.1@2505,-490 2550,-535 D2.K D1.K@2550,-830 ; VCC.1 D1.K
VCN: C29.2 R50.2 U7.18 | length 481
  Top Layer w10: U7.18 1989.29,-1955.71 2070,-1875 C29.2
  Top Layer w20: C29.2 R50.2
VCP: C28.2 R42.1 R49.2 U7.17 VCP.1 | length 1479.4
  Top Layer w10: U7.17 2004.61,-1975.39 2050,-1930 2245,-1930 2260,-1915 C28.2@2260,-1885
  Top Layer w20: C28.2@2250,-1885 C28.2@2260,-1885 ; C28.2 R49.2 2685,-1875 2810,-2000 R42.1 VCP.1
VDD_EXT: J2.19 JP3.2 | length 384.4
  Bottom Layer w25: J2.19 300,-2325 375,-2400 JP3.2
WARNOUT: J2.9 U7.29 | length 1520.7
  Top Layer w10: J2.9 351.65,-1670 450,-1670 605,-1515 1231.72,-1515 1286.72,-1570 1471.57,-1570 1577.79,-1676.23 U7.29
ZX0: J2.2 U7.22 | length 1814.6
  Top Layer w10: J2.2 450.83,-1321.65 500.83,-1371.65 1471.21,-1371.65 1820,-1720.44 1820,-1843.28 1786.32,-1876.97 U7.22
ZX1: J2.3 U7.23 | length 1858.2
  Top Layer w10: J2.3 351.65,-1370 455,-1370 476.65,-1391.65 1462.93,-1391.65 1800,-1728.73 1800,-1835 1777.4,-1857.6 U7.23@1727.4,-1857.6
ZX2: J2.4 U7.24 | length 1664.7
  Top Layer w10: J2.4 450,-1421.65 460,-1411.65 1454.64,-1411.65 1780,-1737.01 1780,-1825 1767.4,-1837.6 U7.24
pads on no net: U1.1 U1.4 U1.7

## Polygon pours and split planes (outlines as drawn)
N on Top Layer "Top Overlay-No Net" (solid, remove dead copper, pour order 2): 0,0 0,-3550 4750,-3550 4750,0
N on Bottom Layer "Top Overlay-No Net" (solid, remove dead copper, pour order 3): 0,0 0,-3550 4750,-3550 4750,0

## Keep-outs
Keep-Out Layer:
  circle w6: c200,-200 r59.06
  circle w6: c200,-3343.31 r59.06
  circle w6: c4524.41,-200 r59.06
  circle w6: c4550,-1800 r50
  circle w6: c4550,-2200 r50
  circle w6: c4550,-2600 r50
  circle w6: c4550,-3000 r50
  circle w6: c850,-3400 r50
  circle w6: c1050,-3400 r50
  circle w6: c1250,-3400 r50
  circle w6: c1450,-3400 r50
  circle w6: c1650,-3400 r50
  circle w6: c1850,-3400 r50
  circle w6: c2050,-3400 r50
  circle w6: c2250,-3400 r50
  circle w6: c4524.41,-3343.31 r59.06
  lines w10: 0,-3464.57 ccw(c78.74,-3464.57) 78.74,-3543.31 4645.67,-3543.31 ccw(c4645.67,-3464.57) 4724.41,-3464.57 4724.41,-78.74 ccw(c4645.67,-78.74) 4645.67,0 78.74,0 ccw(c78.74,-78.74) 0,-78.74 0,-3464.57

## Other copper
Top Layer:
  pour cut-out: 0,0 0,-700 50,-650 1800,-650 1850,-600 1850,-50 1900,0
  pour cut-out: 3100,0 3150,-50 3150,-1650 3050,-1750 2950,-1750 2850,-1850 2850,-2900 2750,-3000 50,-3000 0,-2950 0,-3550 4750,-3550 4750,0
Bottom Layer:
  pour cut-out: 0,0 0,-700 50,-650 1800,-650 1850,-600 1850,-50 1900,0
  pour cut-out: 3100,0 3150,-50 3150,-1650 3050,-1750 2950,-1750 2850,-1850 2850,-2900 2750,-3000 50,-3000 0,-2950 0,-3550 4750,-3550 4750,0

## Silkscreen, mask and mechanical layers (free items; w line width, h text height)
Top Overlay:
  lines w6: 400,-3140 695,-3140 ; 400,-3000 700,-3000 ; 450,-2830 750,-2830 ; 450,-2690 750,-2690 ; 550,-3210 550,-3140 ; 550,-3000 550,-2935 ; 600,-2900 600,-2830 ; 600,-2690 600,-2625 ; 730,-2955 715,-2940 ; 730,-2925 715,-2940 ; 1175,-2900 1175,-2935 ; 1525,-2900 1525,-2935 1175,-2935 ; 1575,-2900 1575,-2935 1595,-2935 ; 1585,-2935 1925,-2935 ; 1925,-2900 1925,-2935 ; 2350,-2830 2650,-2830 ; 2350,-2690 2650,-2690 ; 2375,-2955 2390,-2940 ; 2375,-2925 2390,-2940 ; 2400,-3140 2700,-3140 ; 2400,-3000 2700,-3000 ; 2500,-2900 2500,-2830 ; 2500,-2690 2500,-2625 ; 2550,-3210 2550,-3140 ; 2550,-3000 2550,-2935 ; 715,-2940 1170,-2940 1175,-2935 ; 1925,-2935 1930,-2940 2390,-2940
  lines w8: 625,-2275 625,-1275
  text "CF1+" at 915,-140 h60 r90
  text "CF1-" at 1015,-140 h60 r90
  text "CF2+" at 1115,-140 h60 r90
  text "CF2-" at 1215,-140 h60 r90
  text "CF3+" at 1315,-140 h60 r90
  text "CF3-" at 1415,-140 h60 r90
  text "CF4+" at 1515,-140 h60 r90
  text "CF4-" at 1615,-140 h60 r90
  text "VCC" at 2165,-170 h60
  text "GND" at 2485,-170 h60
  text "GND" at 505,-1340 h60
  text "ZX0" at 640,-1340 h60
  text "ZX1" at 521.87,-1440 h60
  text "ZX2" at 640,-1440 h60
  text "CF1" at 526.37,-1540 h60
  text "CF2" at 640,-1540 h60
  text "Energy Metering Demo Board" at 2650,-1600 h100
  text "CF3" at 524.81,-1640 h60
  text "CF4" at 640,-1640 h60
  text "ATM90E3x-DB" at 2650,-1700 h100
  text "Warn" at 488.29,-1720 h60
  text "IRQ0" at 640,-1740 h60
  text "OUT" at 509.88,-1765 h60
  text "IRQ1" at 495.79,-1840 h60
  text "PM0" at 640,-1840 h60
  text "N" at 4540,-1900 h80
  text "PM1" at 519.93,-1940 h60
  text "DMA" at 640,-1940 h60
  text "SDI" at 526.48,-2040 h60
  text "CS" at 640,-2040 h60
  text "SCLK" at 486.41,-2135 h60
  text "SDO" at 640,-2135 h60
  text "EXT" at 521.93,-2220 h60
  text "RST" at 640,-2235 h60
  text "VDD" at 506.22,-2265 h60
  text "Uc" at 4530,-2310 h80
  text "Ub" at 4530,-2710 h80
  text "Ua" at 4530,-3110 h80
  text "SMART ENERGY" at 3090,-3475 h100
  text "I1+" at 793.87,-3510 h80
  text "I1-" at 1004.97,-3510 h80
  text "I2+" at 1193.87,-3510.37 h80
  text "I2-" at 1404.97,-3510.37 h80
  text "I3+" at 1593.87,-3509.89 h80
  text "I3-" at 1804.97,-3509.89 h80
  text "I4+" at 1993.87,-3509.89 h80
  text "I4-" at 2204.97,-3509.89 h80
Bottom Overlay:
  circle w25: c3055,-135 r11.18
  lines w6: 3055,-275 3055,-220 ; 3070,-135 3170,-135
  lines w10: 3116.92,-84.34 ccw(c3055,-135) 3119.51,-182.31
  text "DC 5V ~ 9V" at 2960,-150 h80
  text "+" at 3230,-165 h60
  text "-" at 3075,-330 h60

## Text inside footprints (layer, text, board x,y; h text height)
C2: Top Overlay "+" at 3022.2,-842.01 h80 r180
C3: Top Overlay "+" at 2530,-605 h80 r90
C4: Top Overlay "+" at 2010,-630 h80
D3: Top Overlay "+" at 1900,-425 h40
D4: Top Overlay "+" at 795,-975 h40 r270
D5: Top Overlay "+" at 1045,-975 h40 r270
D6: Top Overlay "+" at 1295,-975 h40 r270
D7: Top Overlay "+" at 1545,-975 h40 r270